# Altium PCB PCB2.PcbDoc
Units mm, origin at the board's own origin, x right, y up, seen from the top; angles counter-clockwise.
Board outline 120.4 x 213.23 mm, 2 copper layers (Top Layer, Bottom Layer); 33 components, 45 nets, 234 pads, 31 vias.
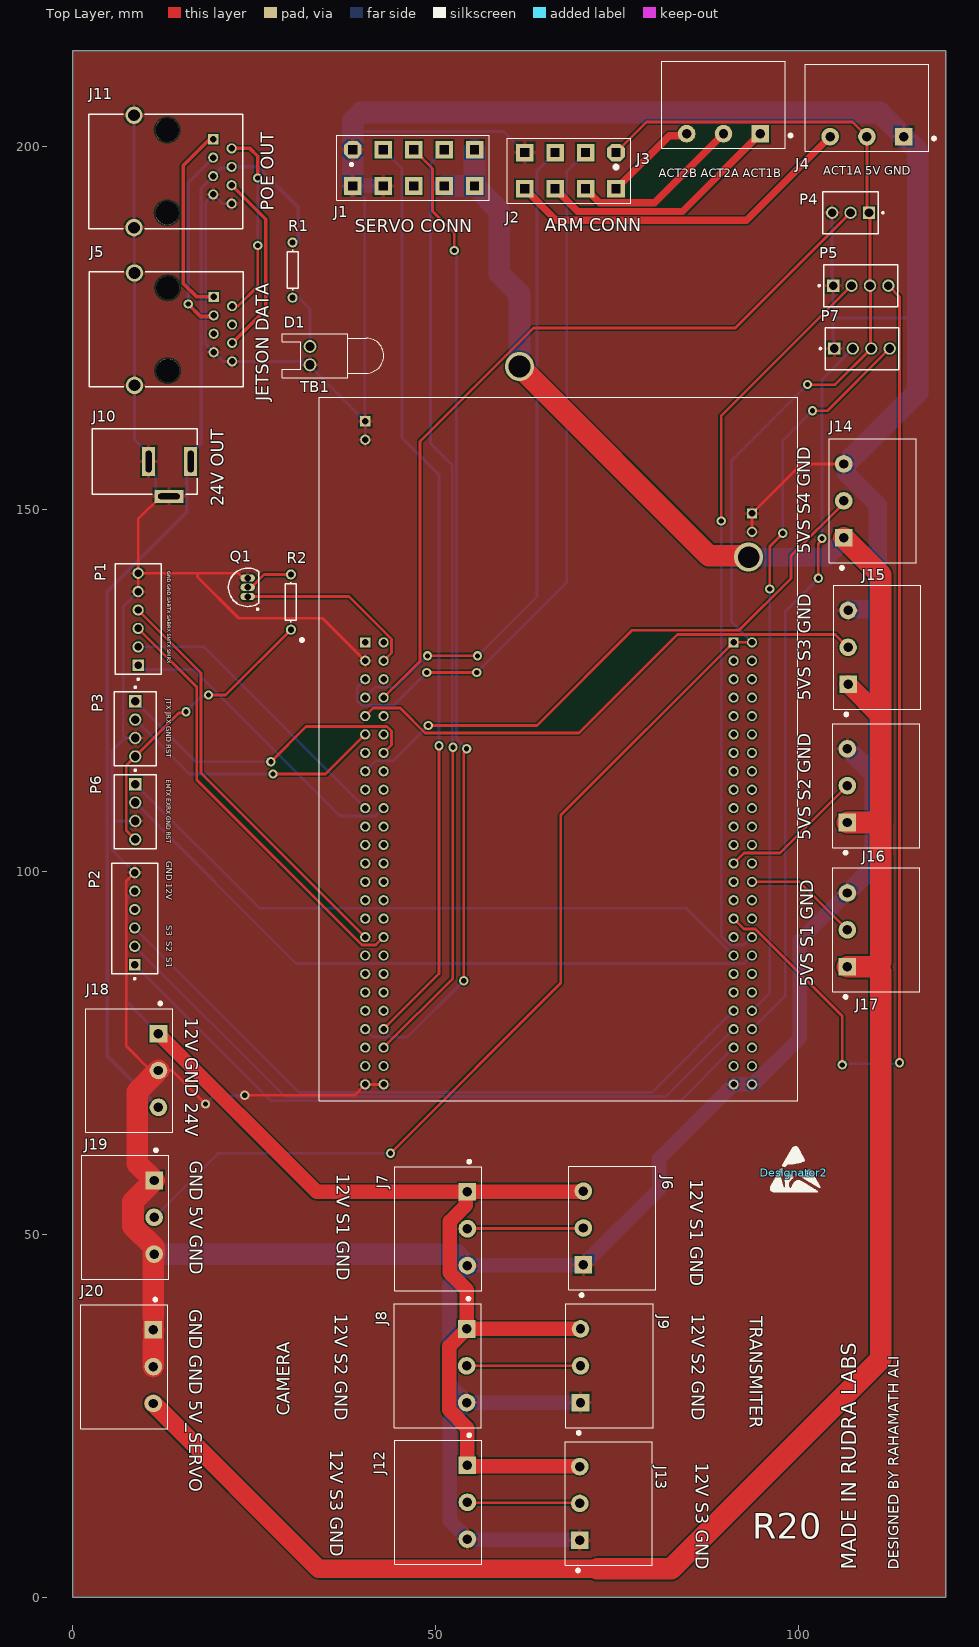
[diagram p0: Top Layer view]
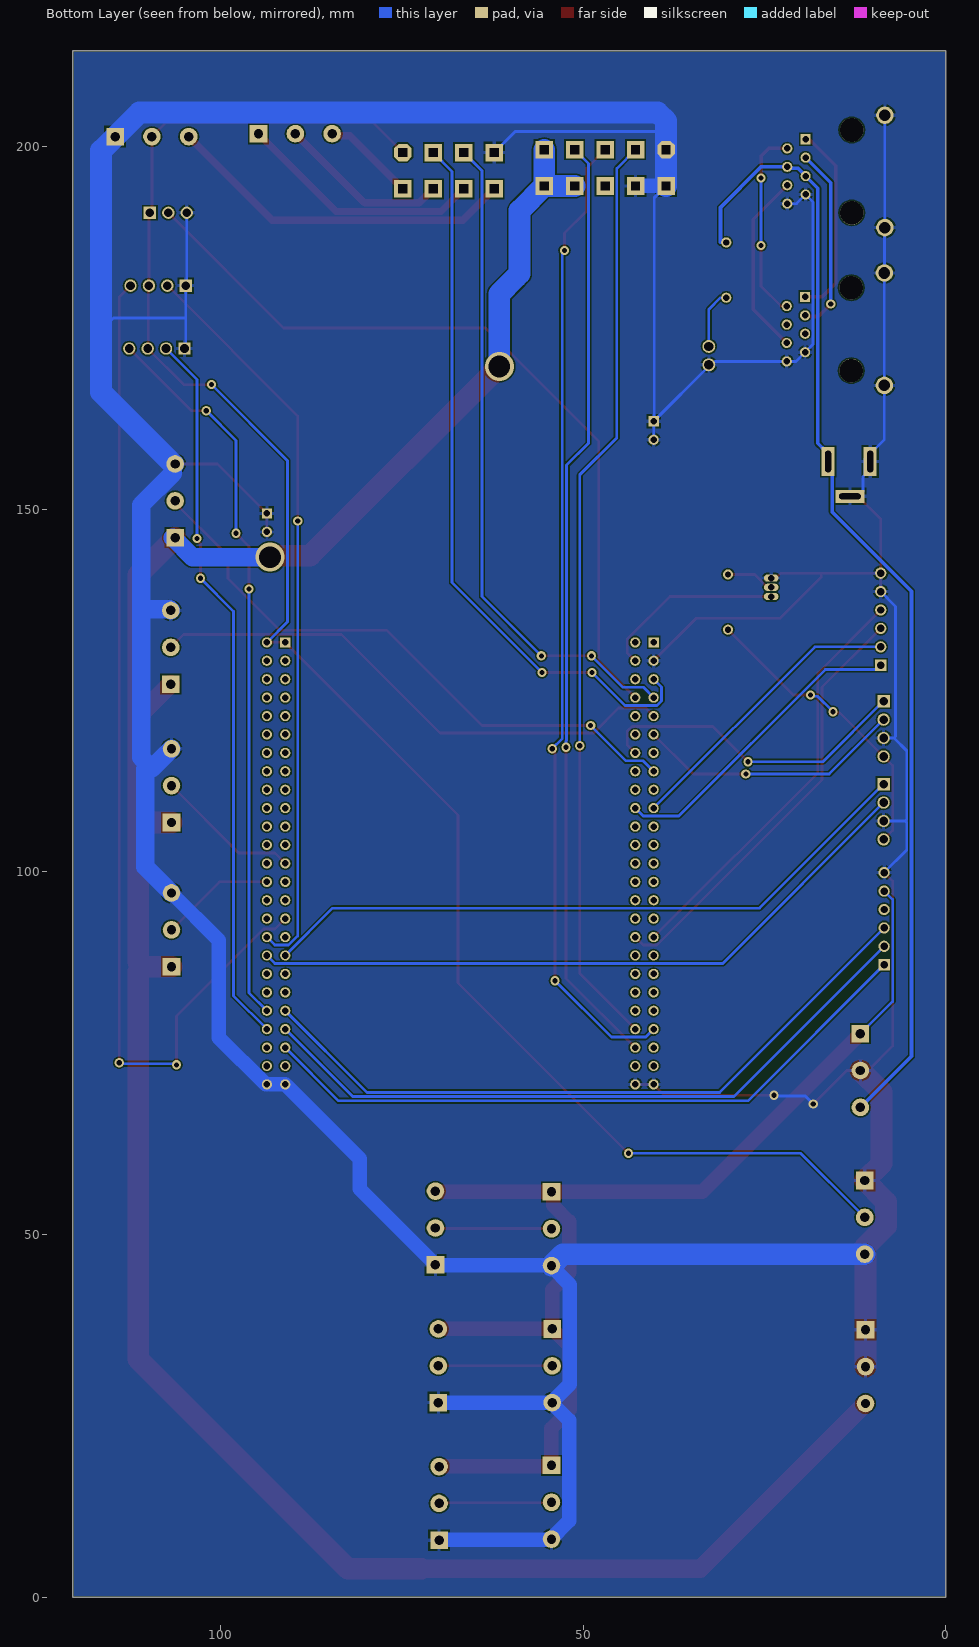
[diagram p1: Bottom Layer view, seen from below]
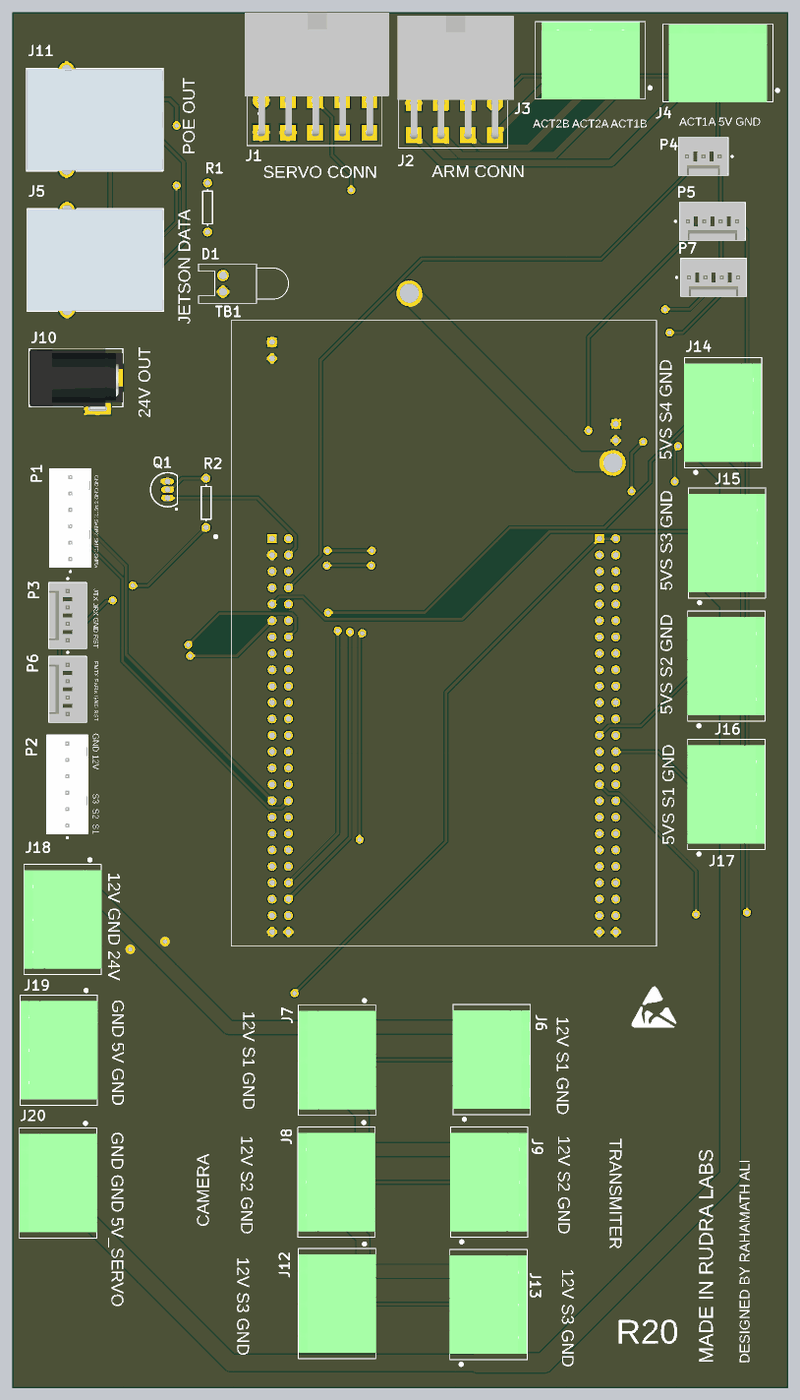
[diagram p2: 3D render of the assembled board from above, using the file's embedded part models]

## Layer stack, top to bottom
Top Solder: solder mask 0.0102, Solder Resist, Dk 3.5
Top Layer: signal copper 0.0356
Dielectric 1: dielectric 0.32, FR-4, Dk 4.8
Bottom Layer: signal copper 0.0356
Bottom Solder: solder mask 0.0102, Solder Resist, Dk 3.5

## Board outline
0,0 120.4,0 120.4,213.225 0,213.225

## Design rules (kind name [scope] priority, off if disabled: settings)
BoardOutlineClearance [All] p1: gap=0.2 ignorepadtopadclearanceinfootprint=FALSE except(0.4: Arc-SplitBarrior Arc-SplitContinuation Track-SplitBarrior Track-SplitContinuation SMDPad-SplitBarrior SMDPad-SplitContinuation THPad-SplitBarrior THPad-SplitContinuation Via-SplitBarrior Via-SplitContinuation Fill-SplitBarrior Fill-SplitContinuation Poly-SplitBarrior Poly-SplitContinuation Region-SplitBarrior Region-SplitContinuation Text-SplitBarrior Text-SplitContinuation)
Clearance "Clearance Bottom Layer" [OnLayer('Bottom Layer')] p1: gap=0.203 ignorepadtopadclearanceinfootprint=TRUE except(0.254: Arc-Text Track-Text SMDPad-Text THPad-Text Via-Text Fill-Text Poly-Text Region-Text Text-Text)
Clearance "Clearance Top Layer" [OnLayer('Top Layer')] p2: gap=0.203 ignorepadtopadclearanceinfootprint=TRUE except(0.254: Arc-Text Track-Text SMDPad-Text THPad-Text Via-Text Fill-Text Poly-Text Region-Text Text-Text)
Clearance [All] p3: gap=0.2 ignorepadtopadclearanceinfootprint=FALSE except(0.089: Arc-Arc Arc-Track Arc-SMDPad Track-Track Track-SMDPad SMDPad-SMDPad; 0.127: Arc-Via Track-Via SMDPad-Via THPad-Via Via-Via; 0.254: Arc-Text Track-Text SMDPad-Text THPad-Text Via-Text Fill-Text Poly-Text Region-Text Text-Text)
HoleSize [All] p1: absolutevalues=TRUE maxlimit=6.3 minlimit=0.2 maxpercent=80.000 minpercent=20.000
MinimumAnnularRing [All] p1: minimumring=0.076
MinimumSolderMaskSliver [All] p1: minsoldermaskwidth=0.1
PolygonConnect PolygonConnect_1 [All] p1: thpad.connectstyle=Relief thpad.reliefconductorwidth=0.508 thpad.reliefentries=4 thpad.polygonreliefangle="90 Angle" thpad.airgapwidth=0.254 smdpad.connectstyle=Relief smdpad.reliefconductorwidth=0.508 smdpad.reliefentries=4 smdpad.polygonreliefangle="90 Angle" smdpad.airgapwidth=0.254 via.connectstyle=Direct via.reliefconductorwidth=0.508 via.reliefentries=4 via.polygonreliefangle="90 Angle" via.airgapwidth=0.254
RoutingCorners [All] p1: cornerstyle=Round minsetback=2.54 maxsetback=2.54
RoutingVias [All] p1: holewidth=0.5 width=1 viastyle="Through Hole" minholewidth=0.2 minwidth=0.45 maxholewidth=3 maxwidth=4
SilkToSilkClearance [All] p1: silktosilkclearance=0.1
SilkToSolderMaskClearance [IsPad] p1: minsilkscreentomaskgap=0.1 clearancetoexposedcopper=TRUE
SolderMaskExpansion [All] p1: expansion=0.102
Width [All] p1: maxlimit=4 minlimit=0.089 preferedwidth=0.381 minimp=50.000000 maximp=50.000000 favimp=50.000000
25 further rules are at their usual default settings.

## Classes and differential pairs
component class "STM32 BOARD": Q1 R2
component class POE+POWER+SERVO+CAMERA: D1 J5 J6 J7 J8 J9 J10 J11 J12 J13 J14 J15 J16 J18 J19 J20 R1
component class "ARM+SERVO+I O": J1 J2 J3 J4 P1 P2 P3 P4 P5 P6 P7

## Components (designator, comment, footprint, x,y, rotation, side; value= is the part's Value field where it differs from the comment)
D1 "LED0" LED-0 32.7,171.2 r90 top
Designator2 "Comment" "LOGO ESD" 99.4,58.5 r0 top
J1 "10 PIN MOLEX CLON" "10 pin molex" 55.4,199.6 r180 top
J2 "8 PIN molex CLON" "8 PIN MOLEX CLON" 74.9,199.2 r180 top
J3 "3 PIN GREEN" PHOENIX_MSTBA_2,5_3-G-5,08_1757255 89.72,201.8 r180 top
J4 "3 PIN GREEN" PHOENIX_MSTBA_2,5_3-G-5,08_1757255 109.5,201.4 r180 top
J5 "61500814221" 61500814221 12.87,174.85 r270 top
J6 "3 PIN GREEN" PHOENIX_MSTBA_2,5_3-G-5,08_1757255 70.4,50.9 r90 top
J7 "3 PIN GREEN" PHOENIX_MSTBA_2,5_3-G-5,08_1757255 54.4,50.8 r270 top
J8 "3 PIN GREEN" PHOENIX_MSTBA_2,5_3-G-5,08_1757255 54.3,31.9 r270 top
J9 "3 PIN GREEN" PHOENIX_MSTBA_2,5_3-G-5,08_1757255 70,31.9 r90 top
J10 "694108301002" 694108301002 9.9,156.6 r270 top
J11 "61500814221" 61500814221 12.8,196.6 r270 top
J12 "3 PIN GREEN" PHOENIX_MSTBA_2,5_3-G-5,08_1757255 54.4,13.08 r270 top
J13 "3 PIN GREEN" PHOENIX_MSTBA_2,5_3-G-5,08_1757255 69.9,12.92 r90 top
J14 "3 PIN GREEN" PHOENIX_MSTBA_2,5_3-G-5,08_1757255 106.3,151.18 r90 top
J15 "3 PIN GREEN" PHOENIX_MSTBA_2,5_3-G-5,08_1757255 106.9,130.98 r90 top
J16 "3 PIN GREEN" PHOENIX_MSTBA_2,5_3-G-5,08_1757255 106.8,111.9 r90 top
J17 "3 PIN GREEN" PHOENIX_MSTBA_2,5_3-G-5,08_1757255 106.8,92.02 r90 top
J18 "3 PIN GREEN" PHOENIX_MSTBA_2,5_3-G-5,08_1757255 11.8,72.62 r270 top
J19 "3 PIN GREEN" PHOENIX_MSTBA_2,5_3-G-5,08_1757255 11.2,52.375 r270 top
J20 "3 PIN GREEN" PHOENIX_MSTBA_2,5_3-G-5,08_1757255 11.1,31.78 r270 top
P1 "22-23-2061" MOLX-22-23-2061_V 9,134.85 r90 top
P2 "22-23-2061" MOLX-22-23-2061_V 8.525,93.555 r90 top
P3 "22-27-2041" MOLX-22-27-2041_V 8.6,119.739 r90 top
P4 "22-27-2031" MOLX-22-27-2031_V 107.24,190.9 r180 top
P5 "22-27-2041" MOLX-22-27-2041_V 108.645,180.85 r180 top
P6 "22-27-2041" MOLX-22-27-2041_V 8.6,108.3 r90 top
P7 "22-27-2041" MOLX-22-27-2041_V 108.82,172.175 r180 top
Q1 "NPN" TO-226-AA 24.1,139.25 r0 top
R1 "Res1" AXIAL-0.3 30.3,183 r90 top value=1K
R2 "Res1" AXIAL-0.3 30.064,137.215 r90 top value=1K
TB1 "STM32F3DISCOVERY" SHIELD_STM32F3DISCOVERY 66.98,116.98 r0 top

## Footprints (in the part's own frame and the unit in brackets; to place one, negate y for a bottom-side part, rotate by r counter-clockwise, add the part's x,y. Pads: shape width x height; smd on the part's side, far side on the other; paste and mask are expansions set on the pad)
"8 PIN MOLEX CLON" [mm]
  oct 2.43x2.43 hole 1.2 square: 1(0,0)
  rect 2.43x2.43 hole 1.2 square: 2(4.2,0) 3(8.4,0) 4(12.6,0) 5(12.6,5) 6(8.4,5) 7(4.2,5) 8(0,5)
  silkscreen extent -2,-2 15,7, body extent -2.95,-13.5 15.15,5.5, height 11
"10 pin molex" [mm]
  oct 2.43x2.43 hole 1.2 square: 1(16.8,0)
  rect 2.43x2.43 hole 1.2 square: 2(12.6,0) 3(8.4,0) 4(4.2,0) 5(0,0) 6(16.8,5) 7(12.6,5) 8(8.4,5) 9(4.2,5) 10(0,5)
  silkscreen extent -2,-2 19,7, body extent -3.1,-13.6 19.3,5.4, height 11
61500814221 [mm] "Modular Jack Horizontal Shielded 8P8C Tab Down"
  rect 1.4x1.4 hole 0.9: 1(-4.445,6.55)
  round 1.4 hole 0.9: 2(-3.175,9.09) 3(-1.905,6.55) 4(-0.635,9.09) 5(0.635,6.55) 6(1.905,9.09) 7(3.175,6.55) 8(4.445,9.09)
  round 3.25 hole 3.25 unplated: MH1(-5.715,0.2) MH2(5.715,0.2)
  round 2.4 hole 1.6: S1(-7.75,-4.37) S2(7.75,-4.37)
  silkscreen extent -7.92,-10.6 7.92,10.6, body extent -7.9,-10.6 7.9,10.6, height 13.7
694108301002 [mm] "DC Power Jack Right Angled(6.4)"
  rect 4x1.8 hole 0.8 slot 3 at 0 deg: 1(0,6.35) 2(0,0.55)
  rect 1.8x4 hole 0.8 slot 3 at 90 deg: 3(4.8,3.35)
  silkscreen extent -4.5,-7.25 4.5,7.25, body extent -4.5,-7.25 5,7.25, height 10.75
AXIAL-0.3 [mm] "Axial Device, Thru-Hole; 2 Leads; 0.3 in Pin Spacing"
  round 1.4 hole 0.85: 1(-3.81,0) 2(3.81,0)
  silkscreen extent -2.77,-0.76 2.77,0.76
LED-0 [mil] "LED; 2 Leads"
  round 70 hole 50: 1(50,0) 2(-50,0)
  silkscreen extent -120,-400 120,150
"LOGO ESD" [mm]
  silkscreen extent -3.23,-2.59 3.66,3.68
MOLX-22-23-2061_V [mm] "THD, 6-Leads, Body 15.24x6.35mm, Pitch 2.54mm"
  rect 1.55x1.55 hole 1.02: 1(-6.35,0)
  round 1.55 hole 1.02: 2(-3.81,0) 3(-1.27,0) 4(1.27,0) 5(3.81,0) 6(6.35,0)
  silkscreen extent -8.39,-3.18 7.62,3.18, body extent -7.54,-3.25 7.54,3.1, height 10.67
MOLX-22-27-2031_V [mm] "Header, 3-Leads, Body 7.62x5.8mm, Pitch 2.54mm"
  rect 1.7x1.7 hole 1.19 paste+0: 1(-2.54,0)
  round 1.7 hole 1.19 paste+0: 2(0,0) 3(2.54,0)
  silkscreen extent -4.59,-2.92 3.81,2.88, body extent -3.81,-2.92 3.81,2.88, height 11.71
MOLX-22-27-2041_V [mm] "CONN, 4-Leads, Body 10.16x5.8mm, Pitch 2.54mm"
  rect 1.7x1.7 hole 1.19: 1(3.81,0)
  round 1.7 hole 1.19: 2(1.27,0) 3(-1.27,0) 4(-3.81,0)
  silkscreen extent -5.08,-2.9 5.85,2.9, body extent -5.08,-2.9 5.08,2.9, height 11.7
PHOENIX_MSTBA_2,5_3-G-5,08_1757255 [mm]
  rect 2.43x2.43 hole 1.3: 1(-5.08,0)
  round 2.43 hole 1.3: 2(0,0) 3(5.08,0)
  silkscreen extent -9.45,-10 8.54,2, body extent -7.62,-9.94 7.62,2.06, height 8.6
SHIELD_STM32F3DISCOVERY [mm]
  rect 1.408x1.408 hole 0.9: 1(-26.67,14.68) 51(24.13,14.68) 101(-26.67,45.16) 103(26.67,32.46)
  round 1.408 hole 0.9: 2(-24.13,14.68) 3(-26.67,12.14) 4(-24.13,12.14) 5(-26.67,9.6) 6(-24.13,9.6) 7(-26.67,7.06) 8(-24.13,7.06) 9(-26.67,4.52) 10(-24.13,4.52) 11(-26.67,1.98) 12(-24.13,1.98) 13(-26.67,-0.56) 14(-24.13,-0.56) 15(-26.67,-3.1) 16(-24.13,-3.1) 17(-26.67,-5.64) 18(-24.13,-5.64) 19(-26.67,-8.18) 20(-24.13,-8.18) 21(-26.67,-10.72) 22(-24.13,-10.72) 23(-26.67,-13.26) 24(-24.13,-13.26) 25(-26.67,-15.8) 26(-24.13,-15.8) 27(-26.67,-18.34) 28(-24.13,-18.34) 29(-26.67,-20.88) 30(-24.13,-20.88) 31(-26.67,-23.42) 32(-24.13,-23.42) 33(-26.67,-25.96) 34(-24.13,-25.96) 35(-26.67,-28.5) 36(-24.13,-28.5) 37(-26.67,-31.04) 38(-24.13,-31.04) 39(-26.67,-33.58) 40(-24.13,-33.58) 41(-26.67,-36.12) 42(-24.13,-36.12) 43(-26.67,-38.66) 44(-24.13,-38.66) 45(-26.67,-41.2) 46(-24.13,-41.2) 47(-26.67,-43.74) 48(-24.13,-43.74) 49(-26.67,-46.28) 50(-24.13,-46.28) 52(26.67,14.68) 53(24.13,12.14) 54(26.67,12.14) 55(24.13,9.6) 56(26.67,9.6) 57(24.13,7.06) 58(26.67,7.06) 59(24.13,4.52) 60(26.67,4.52) 61(24.13,1.98) 62(26.67,1.98) 63(24.13,-0.56) 64(26.67,-0.56) 65(24.13,-3.1) 66(26.67,-3.1) 67(24.13,-5.64) 68(26.67,-5.64) 69(24.13,-8.18) 70(26.67,-8.18) 71(24.13,-10.72) 72(26.67,-10.72) 73(24.13,-13.26) 74(26.67,-13.26) 75(24.13,-15.8) 76(26.67,-15.8) 77(24.13,-18.34) 78(26.67,-18.34) 79(24.13,-20.88) 80(26.67,-20.88) 81(24.13,-23.42) 82(26.67,-23.42) 83(24.13,-25.96) 84(26.67,-25.96) 85(24.13,-28.5) 86(26.67,-28.5) 87(24.13,-31.04) 88(26.67,-31.04) 89(24.13,-33.58) 90(26.67,-33.58) 91(24.13,-36.12) 92(26.67,-36.12) 93(24.13,-38.66) 94(26.67,-38.66) 95(24.13,-41.2) 96(26.67,-41.2) 97(24.13,-43.74) 98(26.67,-43.74) 99(24.13,-46.28) 100(26.67,-46.28) 102(-26.67,42.62) 104(26.67,29.92)
  silkscreen extent -35.6,-48.5 33,48.5
TO-226-AA [mm] "TO, Flat Index; 3 In-Line, Axial Leads; Body Dia. 4.8mm; Leads 0.55 x 0.51 mm (max)"
  oval 2x1 hole 0.9: 1(0,-1.27) 2(0,0) 3(0,1.27)
  silkscreen extent -2.65,-3.13 1.52,2.65, body extent -2.65,-2.66 1.52,2.66, height 5.33

## Part data
D1: "Typical INFRARED GaAs LED", LatestRevisionDate=08-Jul-2005, LatestRevisionNote="Mech Layer 1 removed.", PackageDescription="LED; 2 Leads", PackageReference=LED-0, Published=8-Jun-2000, Publisher="Altium Limited"
J2: Color=Black, Manufacturer 1=Molex, Manufacturer Part Number 1=76825-0008, Supplier Part Number 1=WM11972-ND, ComponentLink1Description=http://www.alliedelec.com/images/products/datasheets/bm/BrandonData/70717241.pdf?src-supplier=Allied+Electronics, ComponentLink1URL=http://www.alliedelec.com/images/products/datasheets/bm/BrandonData/70717241.pdf?src-supplier=Allied+Electronics, ComponentLink2Description=http://www.farnell.com/datasheets/2216656.pdf?src-supplier=Farnell, ComponentLink2URL=http://www.farnell.com/datasheets/2216656.pdf?src-supplier=Farnell, ComponentLink3Description=http://www.farnell.com/datasheets/1968956.pdf?src-supplier=Element14, ComponentLink3URL=http://www.farnell.com/datasheets/1968956.pdf?src-supplier=Element14, ComponentLink4Description=http://www.farnell.com/datasheets/2001779.pdf?src-supplier=Element14, ComponentLink4URL=http://www.farnell.com/datasheets/2001779.pdf?src-supplier=Element14, ComponentLink5Description=http://www.farnell.com/datasheets/2216656.pdf?src-supplier=Newark, ComponentLink5URL=http://www.farnell.com/datasheets/2216656.pdf?src-supplier=Newark, ComponentLink6Description=https://www.molex.com/pdm_docs/sd/768250008_sd.pdf?src-supplier=Digi-Key, ComponentLink6URL=https://www.molex.com/pdm_docs/sd/768250008_sd.pdf?src-supplier=Digi-Key, Contact Material=Copper, Contact Plating=Tin, Gender=Male, Mount="Through Hole", Number of Circuits=8, Number of Contacts=8, Number of Pins=8, Number of Rows=2, Orientation="Right Angle", Pitch=5.7mm, Pricing 1="1=2.83000, 10=2.72000, 25=2.49360, 50=2.38040, 100=2.26700, 250=1.98364, 672=1.92695, 1344=1.64357, 2688=1.53022 (USD)", REACH SVHC=Unknown, RoHS=Yes, Stock 1=794, Supplier 1=Digi-Key, Termination="Through Hole"
J3 J4 J6 J7 J8 J9 J12 J13 J14 J15 J16 J17 J18 J19 J20: Color=Grey,Green, Current=15A, Current Rating=12A, Flammability Rating="UL94 V-0", Housing Color=Green, Manufacturer 1="Phoenix Contact", Manufacturer Part Number 1=1757255, Package Quantity=50, Supplier Part Number 1=277-1107-ND, Voltage=300V, Voltage Rating=250V, Voltage Rating (DC)=320V, Approvals=UL,CSA,VDE,EN, ComponentLink1Description=https://datasheet.ciiva.com/15197/getdatasheetpartid-176351-15197329.pdf?src-supplier=Verical, ComponentLink1URL=https://datasheet.ciiva.com/15197/getdatasheetpartid-176351-15197329.pdf?src-supplier=Verical, ComponentLink2Description=https://datasheet.ciiva.com/16096/1757255-16096404.pdf?src-supplier=Onlinecomponents.com, ComponentLink2URL=https://datasheet.ciiva.com/16096/1757255-16096404.pdf?src-supplier=Onlinecomponents.com, ComponentLink3Description=https://datasheet.ciiva.com/7630/1697152-7630840.pdf?src-supplier=Element14, ComponentLink3URL=https://datasheet.ciiva.com/7630/1697152-7630840.pdf?src-supplier=Element14, ComponentLink4Description=https://datasheet.ciiva.com/795/1757255-795421.pdf?src-supplier=Digi-Key, ComponentLink4URL=https://datasheet.ciiva.com/795/1757255-795421.pdf?src-supplier=Digi-Key, ComponentLink5Description=https://datasheet.ciiva.com/29210/569707-da-01-en-grundgehaeuse-1757255-250-st-29210878.pdf?src-supplier=Conrad, ComponentLink5URL=https://datasheet.ciiva.com/29210/569707-da-01-en-grundgehaeuse-1757255-250-st-29210878.pdf?src-supplier=Conrad, Connector Type=Plug, Contact Material=Tin, Contact Plating=Tin, Depth=12mm, Gender=Male, Height=12.1mm, Housing Material=Polybutylene, Lead Free="Lead Free", Length=17.24mm, Max Current Rating=12A, Mount="Through Hole", Number of Contacts=3, Number of Levels=1, Number of Poles=3, Number of Positions=3, Number of Positions Per Level=3, Number of Rows=1, Orientation="Right Angle", Packaging=Bulk, Pitch=5.08mm, Pricing 1="1=1.03000, 10=0.99000, 50=0.94720, 100=0.92130, 250=0.86100, 500=0.79212, 1000=0.73185, 2500=0.69741, 5000=0.65436 (USD)", REACH SVHC="No SVHC", RoHS=Yes, Stock 1=4025, Supplier 1=Digi-Key, Termination=Solder, Weight=5.396916oz, Width=17.16mm
J5 J11: library part RJ45, "Modular Jack WR-MJ, Tab Down, Shielded, Horizontal Entry, THT, 8P8C", Color=Black, Contact Resistance=20mOhm, Current Rating=1.5A, Flammability Rating="UL94 V-0", Insulation Resistance=500MR, Manufacturer="Wurth Elektronik", Manufacturer 1="Wurth Electronics", Max Operating Temperature=85°C, Min Operating Temperature=-40°C, Operating Temperature=-40to85degC, Package Quantity=80, Supplier Part Number 1=732-2111-ND, Voltage Rating (AC)=120V, Withstanding Voltage=1000VAC, Working Voltage=120VAC, Compliance=Leadfree/RoHS, ComponentLink1Description=https://datasheet.ciiva.com/1108/76605-1108145.pdf?src-supplier=Element14, ComponentLink1URL=https://datasheet.ciiva.com/1108/76605-1108145.pdf?src-supplier=Element14, ComponentLink2Description=https://datasheet.ciiva.com/4561/61500814221-78459-4561634.pdf?src-supplier=Mouser, ComponentLink2URL=https://datasheet.ciiva.com/4561/61500814221-78459-4561634.pdf?src-supplier=Mouser, ComponentLink3Description=https://datasheet.ciiva.com/686/61500814221-686710.pdf?src-supplier=Digi-Key, ComponentLink3URL=https://datasheet.ciiva.com/686/61500814221-686710.pdf?src-supplier=Digi-Key, ComponentLink4Description=https://datasheet.ciiva.com/11726/0900766b80f88678-11726201.pdf?src-supplier=RSComponents, ComponentLink4URL=https://datasheet.ciiva.com/11726/0900766b80f88678-11726201.pdf?src-supplier=RSComponents, ComponentLink5Description=https://datasheet.ciiva.com/48689/001088220-da-01-en-wr-com-modular-jack-61500814221-48689546.pdf?src-supplier=Conrad, ComponentLink5URL=https://datasheet.ciiva.com/48689/001088220-da-01-en-wr-com-modular-jack-61500814221-48689546.pdf?src-supplier=Conrad, Connector Type=Jack,RJ45,Socket, Contact Material="Copper Alloy,Copper", Contact Plating=Gold, Datasheet URL=https://katalog.we-online.de/em/datasheet/61500814221.pdf, Depth=21.2mm, Direction=Down, Entrance=Horizontal, Gender=Female, Height=19.95mm, Housing Material=PBT, Length=13.65mm, Manufacturer Part Number 1=61500814221, Manufacturer URL=http://www.we-online.de, Mating Cycles=500, Mount="Through Hole,PCB", Mounting Technology=THT, Number of Contacts=8, Number of Ports=1, Number of Positions=8, Number of Rows=1, Orientation="Right Angle", Package Reference=61500814221, Packaging=Tray, Part Number=61500814221, Pin Number=8P8C, Port=1x1, Pricing 1="1=2.38000, 10=2.33000, 50=2.24000, 100=2.15000, 500=2.06100 (USD)", Publisher=WurthElektronik, Rated Current=1.5A, REACH SVHC=Unknown, RoHS=Yes, Shielding=Shielded, Stock 1=262, Supplier 1=Digi-Key, Termination="Through Hole", Width=15.88mm
J10: library part "DC POWER JACK", "DC Power Jack Connector WR-DC, Male, Right Angled, THT, 5 A, 24 V", Manufacturer="Wurth Elektronik", Operating Temperature=-40to85degC, Rated Current=5A, Working Voltage=24V, Datasheet URL=http://katalog.we-online.de/em/datasheet/6941xx301002.pdf, Gender=Male, Manufacturer URL=http://www.we-online.de, Mounting Technology=THT, Opening Diameter=6.4mm, Orientation=RightAngled, Package Reference=694108301002, Packaging=Bag, Part Number=694108301002, Plug Inner Diameter=2.55mm, Plug Outer Diameter=5.5mm, Publisher=WurthElektronik
P1 P2: library part CMP-2000-05536-1, "Male Header, Pitch 2.54 mm, 1 x 6 Position, Height 10.67 mm, Tail Length 3.56 mm, 0 to 70 degC, RoHS, Bulk", Current Rating=4A, Manufacturer=Molex, Package Description="Male Header, Pitch 2.54 mm, 1 x 6 Position, Height 10.67 mm, Tail Length 3.56 mm", Voltage Rating=250V, =002223206122-23-2061-PBA-6373-06A102, Brand=Molex, Contact Material=Brass, Contact Plating=Tin, Datasheet URL=https://datasheet.ciiva.com/19460/232303-19460895.pdf, Datasheet Version="Rev. P, 09/2001", Factory Pack Quantity=1000, Housing Material=Nylon, Manufacturer URL=http://www.molex.com/, Mounting Angle=Vertical, Mounting Style=ThroughHole, Mounting Technology=ThroughHole, Number of Positions=6, Number of Positions / Contacts=6, Number of Rows=1, Package Reference=22-23-2061, Packaging=Bulk, Pitch=2.54mm, Product Category=.100K.K.Connectors, Product Type=Headers, RoHS=Details, Series=6373, Termination Style=ThroughHole, Tradename=KK, Type=PinStrip
P3 P5 P6 P7: library part CMP-2000-05243-1, "Male Header, Pitch 2.54 mm, 1 x 4 Position, Height 11.7 mm, Tail Length 3.56 mm, RoHS, Bulk", Current Rating=4A, Manufacturer=Molex, Operating Temperature=0degCto+75degC, Voltage Rating=250V, Contact Material=Tinplatedbrass, Datasheet URL=http://www.molex.com/pdm_docs/sd/022272041_sd.pdf, Datasheet Version="Rev. F, 06/2009", Housing Material=Nylon(UL94V-0), Manufacturer URL=http://www.molex.com/
P4: library part CMP-2000-05538-1, "Male Header, Pitch 2.54 mm, 1 x 3 Position, Height 11.7 mm, Tail Length 3.56 mm, -40 to 80 degC, RoHS, Bulk", Current Rating=4A, Manufacturer=Molex, Operating Temperature=0°Cto+75°C, Package Description="Male Header, Pitch 2.54 mm, 1 x 3 Position, Height 11.7 mm, Tail Length 3.56 mm", Voltage Rating=250V, Contact Material=Tinplatedbrass, Datasheet URL=http://www.molex.com/webdocs/datasheets/pdf/en-us/0022272031_PCB_HEADERS.pdf, Datasheet Version=06/2016, Housing Material=Nylon(UL94V-0), Manufacturer URL=http://www.molex.com/, Mounting Technology=ThroughHole, Package Reference=22-27-2031, Package URL=http://www.molex.com/pdm_docs/sd/022272031_sd.pdf
Q1: "NPN Bipolar Transistor", Code_JEDEC=TO-226-AA, LatestRevisionDate=17-Jul-2002, LatestRevisionNote="Re-released for DXP Platform.", PackageDescription="TO, Flat Index; 3 In-Line, Axial Leads; Body Dia. 4.8mm; Leads 0.55 x 0.51 mm (max)", PackageReference=TO-226-AA, Published=8-Jun-2000, Publisher="Altium Limited"
R1 R2: "Resistor", LatestRevisionDate=17-Jul-2002, LatestRevisionNote="Re-released for DXP Platform.", PackageDescription="Axial Device, Thru-Hole; 2 Leads; 0.3 in Pin Spacing", PackageReference=AXIAL-0.3, Published=8-Jun-2000, Publisher="Altium Limited"
TB1: "STM32F303VCT6 Discovery STM32F3 ARM® Cortex®-M4 MCU 32-Bit Embedded Evaluation Board", Package="LQFP-100 STMicroelectronics", Availability=Unavailable, MF=STMicroelectronics, MP=STM32F3DISCOVERY, Price=None, SnapEDA_Link=https://www.snapeda.com/parts/STM32F3DISCOVERY/STMicroelectronics/view-part/10815/?ref=snap

## Via types
v1: diameter 1.27, hole 0.711, Top Layer to Bottom Layer, 29 vias
v2: diameter 4, hole 3, Top Layer to Bottom Layer, 2 vias

## Nets (pads, with @x,y where several pads share a name; then routed paths per layer and width w, separated by ;. In a path a pad name is that pad's centre, name@x,y a point inside that pad or via, vN(x,y) a via of type N, cw(c..) or ccw(c..) an arc to the next point about the centre after c; other vN are vias at no path point)
5V: J2.1 J4.2 J19.2 P4.1 P5.3 P7.3 TB1.51 TB1.52 | length 247
  Top Layer w0.381: v1(43.8,61.2) 67.283,84.683 67.283,107.833 TB1.51 TB1.52 ; J2.1 79.109,203.409 107.491,203.409 J4.2 109.5,191.18 109.915,190.765 P5.3 110.003,180.763 110.003,172.263 P7.3 105.115,167.2 v1(101.3,167.2)
  Bottom Layer w0.381: J19.2@11.869,52.506 11.869,53.044 20.025,61.2 v1(43.8,61.2) ; TB1.52 90.806,134.504 90.806,156.706 v1(101.3,167.2)
5V_SERVO: J1.5 J1.9 J1.10 J14.1 J15.1 J16.1 J17.1 J20.3 | length 346.3
  Top Layer w2.54: J20.3 33.9,3.9 72.3,3.9 ; J15.1 111.4,121.4
  Top Layer w3: v2(61.6,169.7) 87.709,143.591 93.009,143.591 v2(93.2,143.4) ; 72.3,3.9 82.5,3.9 111.4,32.8 111.4,86.28 110.74,86.94 ; J14.1 111.4,141 111.4,121.4 111.4,106.8 111.38,106.82 ; J17.1 110.74,86.94 ; J16.1 111.38,106.82 ; 110.74,86.94 111.4,87.6 111.4,102.22 111.38,102.24 111.38,106.82
  Bottom Layer w0.381: 58.8,182.5 59.3,182
  Bottom Layer w2.54: v2(93.2,143.4) 103.9,143.4 J14.1@106.6,146.1
  Bottom Layer w3: J1.9 J1.10 ; J1.5 J1.10 ; 58.8,182.5 58.8,191.2 J1.10 ; 59.3,182 61.6,179.7 v2(61.6,169.7)
12V: J6.3 J7.1 J8.1 J9.3 J12.1 J13.3 J18.1 P2.5 | length 162.1
  Top Layer w2: J18.1@12.015,77.485 33.62,55.88 J7.1 54.185,55.665 54.185,54.005 51.982,51.802 51.982,44.718 54.3,42.4 J8.1 ; J7.1@54.615,55.93 70.35,55.93 J6.3 ; J13.3 69.82,18.08 54.48,18.08 J12.1 54.4,23.3 51.882,25.818 51.882,34.562 J8.1 ; J9.3 J8.1
  Bottom Layer w0.381: P2.5 7.356,96.196 7.356,82.144 J18.1
24V: J10.1 J11.4 J11.5 J18.3 R1.2 | length 155.2
  Bottom Layer w0.5: J18.3 4.763,74.577 4.763,138.7 15.703,149.64 15.703,156.053 J10.1 ; J10.1@16.6,158.05 17.683,159.133 17.683,194.298 20.448,197.063 21.718,197.063 J11.4 25.504,197.235 31.1,191.639 31.1,186.81
ACT1A: J2.5 J4.3 | length 48.7
  Top Layer w1: J2.5 66.625,189.875 92.895,189.875 J4.3
ACT1B: J2.6 J3.1 | length 34
  Top Layer w1: J2.6 69.621,191.079 84.079,191.079 J3.1
ACT2A: J2.7 J3.2 | length 23.8
  Top Layer w1: J2.7 72.618,192.282 80.202,192.282 J3.2
ACT2B: J2.8 J3.3 | length 12.9
  Top Layer w1: J2.8 82.226,201.526 84.366,201.526 J3.3
"ARM ENCODER 1": J2.2 TB1.5 | length 100
  Top Layer w0.381: v1(48.8,127.5) v1(55.7,127.5)
  Bottom Layer w0.381: TB1.5 39.213,125.482 39.213,123.585 39.856,122.942 44.242,122.942 v1(48.8,127.5) ; v1(55.7,127.5) 68.109,139.909 68.109,196.609 J2.2
"ARM ENCODER 2": J2.3 TB1.7 | length 91.7
  Top Layer w0.381: v1(48.9,129.8) v1(55.8,129.8)
  Bottom Layer w0.381: TB1.7 41.753,125.482 44.582,125.482 v1(48.9,129.8) ; v1(55.8,129.8) 63.994,137.994 63.994,196.694 J2.3
"ARM SERVO 1": J1.2 TB1.44 | length 127.6
  Top Layer w0.381: TB1.44 50.5,85.97 v1(50.5,117.4)
  Bottom Layer w0.381: J1.2 45.391,197.009 45.391,159.879 50.5,154.77 v1(50.5,117.4)
"ARM SERVO 2": J1.3 TB1.43 | length 135.1
  Top Layer w0.381: J1.3 49.591,197.009 49.591,191.109 52.6,188.1 v1(52.6,185.7) ; v1(53.9,85) 53.9,116.359 54.3,116.759 v1(54.3,117)
  Bottom Layer w0.381: TB1.43 41.408,77.222 46.122,77.222 v1(53.9,85) ; v1(52.6,185.7) 52.9,185.4 52.9,118.4 v1(54.3,117)
"ARM SERVO 3": J1.4 TB1.46 | length 129.8
  Top Layer w0.381: TB1.46 52.4,85.33 v1(52.4,117.2)
  Bottom Layer w0.381: J1.4 49.306,197.706 49.306,159.12 52.316,156.111 52.316,118.158 52.4,118.074 v1(52.4,117.2)
"CAM_SERVO 1": J17.2 TB1.78 | length 15.9
  Top Layer w0.381: TB1.78 100.18,98.64 J17.2
"CAM_SERVO 2": J16.2 TB1.75 | length 20.1
  Top Layer w0.381: TB1.75 92.553,102.622 97.522,102.622 J16.2
"CAM_SERVO 3": J15.2 TB1.9 | length 74.8
  Top Layer w0.381: TB1.9 41.408,122.598 45.147,122.598 48.574,119.171 69.778,119.171 83.364,132.758 105.122,132.758 J15.2
"CAM_SERVO 4": J14.2 TB1.15 | length 83.6
  Top Layer w0.381: v1(49,120.2) 63.998,120.2 77.14,133.342 91.897,133.342 99.02,140.465 99.02,143.6 J14.2@106.6,151.18
  Bottom Layer w0.381: TB1.15 41.753,115.322 44.122,115.322 v1(49,120.2)
"EMER RX": P6.2 TB1.86 | length 94.7
  Bottom Layer w0.381: P6.2 30.788,87.382 92.553,87.382 TB1.86
"EMER TX": P6.1 TB1.85 | length 92.3
  Bottom Layer w0.381: P6.1 25.708,95.002 84.588,95.002 TB1.85
GND: D1.2 J1.1 J1.6 J1.7 J2.4 J4.1 J5.7 J5.8 J5.S1 J5.S2 J6.1 J7.3 J8.3 J9.1 J10.2 J10.3 J11.7 J11.8 J11.S1 J11.S2 J12.3 J13.1 J14.3 J15.3 J16.3 J17.3 J18.2 J19.1 J19.3 J20.1 J20.2 P1.5 P1.6 P2.6 P3.3 P4.3 P5.1 P6.3 P7.1 Q1.3 TB1.3 TB1.49 TB1.50 TB1.99 TB1.100 TB1.101 TB1.102 TB1.103 TB1.104 | length 844.8
  Top Layer w0.381: P2.6 7.356,98.736 7.356,75.984 J18.2@10.72,72.62 ; P1.5 P1.6 ; J18.2 13.68,72.62 v1(18.3,68) ; J10.3 12.15,151.8 9,148.65 P1.6 ; v1(23.7,69.2) 38.81,69.2 TB1.49 TB1.50 TB1.50@42.771,70.621 ; Q1.3 23.445,140.52 22.765,141.2 17.2,141.2 ; TB1.3 34.441,134.989 22.872,134.989 17.2,140.661 17.2,141.2 ; TB1.104 TB1.103 100.47,156.26 J14.3@106.6,156.26 ; P1.6 17.2,141.2
  Top Layer w3: J20.2 J20.1 11.1,47.195 J19.3 11.2,48.248 8.282,51.166 8.282,54.537 J19.1 8.882,59.773 8.882,69.702 J18.2
  Bottom Layer w0.381: J11.S1 J11.S2 8.465,188.815 8.465,182.635 J5.S1 J5.S2 8.5,159.65 11.16,156.99 11.16,154.79 11.44,154.51 11.44,152.509 12.15,151.8 J10.3 J10.3@14.05,151.8 ; P2.6 5.407,103.023 5.407,106.807 5.63,107.03 ; P6.3 5.63,107.03 ; P3.3 7.169,118.469 ; P1.5 6.946,136.606 6.946,118.692 7.169,118.469 ; v1(18.3,68) 19.4,69.1 23.6,69.1 v1(23.7,69.2) ; J11.8 21.889,192.157 20.619,192.157 J11.7 18.326,192.401 18.326,172.769 J5.7 20.689,170.407 J5.8 J5.8 31.847,170.405 32.322,169.93 D1.2 32.7,169.75 TB1.101@40.234,162.217 ; J1.6 40.234,192.966 TB1.101@40.234,162.217 ; 38.6,201.5 39.207,202.107 59.393,202.107 J2.4 ; TB1.102 TB1.101 TB1.101@40.234,162.217 ; P4.3 104.7,180.985 P5.1 104.835,176.4 ; P7.1 104.835,172.35 104.835,176.4 ; 110.29,114.29 110.44,114.14 ; 110.35,136.75 110.5,136.9 ; 116.32,165.98 116.51,166.17 ; 116.51,174.69 114.8,176.4 104.835,176.4 ; 5.63,107.03 5.407,107.253 5.407,116.707 7.169,118.469
  Bottom Layer w2: J1.6 J1.7 ; J7.3 54.4,45.604 51.882,43.085 51.882,29.355 54.3,26.936 J8.3 54.3,26.704 51.982,24.385 51.982,10.535 54.596,7.92 J13.1@69.82,7.92 ; J8.3@54.499,26.82 J9.1 ; J7.3@54.516,45.72 54.566,45.77 J6.1@70.35,45.77 ; J6.1 80.863,56.283 80.863,60.452 TB1.99 TB1.100 93.807,70.7 100.263,77.155 100.263,90.563 J17.3
  Bottom Layer w2.54: J14.3@106.6,156.26 106.6,154.982 111,150.582 111,136.75 111,115.8 109.49,114.29 ; J17.3 110.44,100.74 110.44,114.14 ; J16.3 109.49,114.29 ; J15.3 107.04,136.2 110.9,136.2 ; 110.29,114.29 109.49,114.29
  Bottom Layer w3: J19.3 52.825,47.295 J7.3 ; J1.6 J1.1 38.6,201.5 38.6,203.572 39.747,204.718 111.262,204.718 J4.1 116.51,199.47 116.51,174.69 116.51,166.17 ; J14.3@106.6,156.26 116.32,165.98
"H1 GPIO1": P5.2 TB1.84 | length 102.3
  Top Layer w0.381: v1(89.4,148.4) 89.4,162.875 P5.2
  Bottom Layer w0.381: v1(89.4,148.4) 89.4,91.178 90.656,89.922 92.553,89.922 TB1.84
"H1 GPIO2": P5.4 TB1.81 | length 143.1
  Top Layer w0.381: TB1.81 92.553,92.118 94.105,92.118 106.1,80.123 v1(106.1,73.4) ; P5.4 114,179.305 v1(114,73.7)
  Bottom Layer w0.381: v1(106.1,73.4) 106.25,73.55 113.85,73.55 v1(114,73.7)
"H2 GPIO1": P7.2 TB1.94 | length 99.6
  Top Layer w0.381: v1(102.8,140.5) 102.8,145.259 103.3,145.759 v1(103.3,146)
  Bottom Layer w0.381: TB1.94 98.238,82.908 98.238,135.938 v1(102.8,140.5) ; v1(103.3,146) 103.3,167.925 P7.2
"H2 GPIO2": P7.4 TB1.92 | length 100.4
  Top Layer w0.381: v1(96.1,139) 96.1,144.9 v1(97.9,146.7) ; v1(102,163.6) 104.055,163.6 P7.4
  Bottom Layer w0.381: TB1.92 96.1,83.31 v1(96.1,139) ; v1(97.9,146.7) 97.9,159.5 v1(102,163.6)
"JETSON RX": P3.2 TB1.11 | length 37.1
  Top Layer w0.381: v1(27.6,113.5) 34.85,113.5 TB1.11
  Bottom Layer w0.381: P3.2 16.109,113.5 v1(27.6,113.5)
"JETSON TX": P3.1 TB1.14 | length 44.5
  Top Layer w0.381: v1(27.3,115.2) 32.158,120.058 43.305,120.058 43.948,119.415 43.948,117.518 TB1.14
  Bottom Layer w0.381: P3.1 16.949,115.2 v1(27.3,115.2)
NetD1_1: D1.1 R1.1 | length 7.7
  Bottom Layer w0.381: 31.1,179.19 32.7,177.59 32.7,173.115 D1.1@33.345,172.47
NetQ1_2: Q1.2 R2.2 | length 6.7
  Top Layer w0.381: Q1.2 24.6,139.25 26.375,141.025 R2.2
NRST: Q1.1 TB1.4 | length 25.7
  Top Layer w0.381: Q1.1 38.083,137.98 43.948,132.115 43.948,130.218 TB1.4
RST: P3.4 P6.4 R2.1 | length 41.2
  Top Layer w0.381: P6.4 7.356,105.734 7.356,114.686 14.601,121.93 15.43,121.93 v1(15.6,122.1) ; v1(18.7,124.4) 21.059,124.4 R2.1
  Bottom Layer w0.381: v1(15.6,122.1) 17.73,124.23 18.53,124.23 v1(18.7,124.4)
RX+: J5.1 J11.1 | length 26.9
  Top Layer w0.5: J11.1 18.845,201.045 15.2,197.4 15.2,181.2 17.105,179.295 J5.1
RX-: J5.2 J11.2 | length 25.9
  Top Layer w0.381: 22.76,178.025 25.5,180.765 v1(25.5,186.4)
  Top Layer w0.5: J11.2 24.425,199.775 25.5,198.7 v1(25.5,195.7)
  Bottom Layer w0.381: v1(25.5,186.4) v1(25.5,195.7)
S1: J6.2 J7.2 | length 16
  Top Layer w0.381: J7.2@55.2,50.8 55.25,50.85 J6.2@71.15,50.85
S2: J8.2 J9.2 | length 15.7
  Top Layer w0.381: J8.2@55.1,31.9 J9.2@70.8,31.9
S3: J12.2 J13.2 | length 15.5
  Top Layer w0.381: J12.2@55.2,13.08 55.28,13 J13.2@70.62,13
"SABERTOOTH RX": P1.4 TB1.33 | length 58.1
  Top Layer w0.381: P1.4 17.671,127.449 17.671,113.659 TB1.33
"SABERTOOTH TX": P1.3 TB1.34 | length 59.9
  Top Layer w0.381: P1.3 17.087,125.493 17.087,112.691 39.856,89.922 41.753,89.922 TB1.34
"SMART ELEX RX": P1.2 TB1.19 | length 40.5
  Bottom Layer w0.381: P1.2 18.07,131.04 TB1.19
"SMART ELEX TX": P1.1 TB1.20 | length 42.9
  Bottom Layer w0.381: P1.1 9.584,127.915 16.639,127.915 36.853,107.702 41.753,107.702 TB1.20
STATUS1: P2.1 TB1.95 | length 93.4
  Bottom Layer w0.381: P2.1 27.296,68.434 83.764,68.434 TB1.95
STATUS2: P2.2 TB1.93 | length 95
  Bottom Layer w0.381: P2.2 29.252,69.018 81.808,69.018 TB1.93
STATUS3: P2.3 TB1.91 | length 96.6
  Bottom Layer w0.381: P2.3 31.208,69.602 79.853,69.602 TB1.91
TT_POT: P4.2 TB1.8 | length 109.8
  Top Layer w0.381: TB1.8 47.871,129.061 47.871,159.357 63.517,175.002 91.342,175.002 P4.2
TX+: J5.3 J11.3 | length 25.9
  Top Layer w0.5: v1(15.9,178.3) 17.6,176.6 19.265,176.6 J5.3
  Bottom Layer w0.5: v1(15.9,178.3) 15.9,195.055 J11.3
TX-: J5.6 J11.6 | length 25.6
  Top Layer w0.5: J11.6 26.588,189.997 26.588,177.573 J5.6
pads on no net: J1.8 J5.4 J5.5 J5.MH1 J5.MH2 J11.MH1 J11.MH2 P2.4 TB1.1 TB1.2 TB1.6 TB1.10 TB1.12 TB1.13 TB1.16 TB1.17 TB1.18 TB1.21 TB1.22 TB1.23 TB1.24 TB1.25 TB1.26 TB1.27 TB1.28 TB1.29 TB1.30 TB1.31 TB1.32 TB1.35 TB1.36 TB1.37 TB1.38 TB1.39 TB1.40 TB1.41 TB1.42 TB1.45 TB1.47 TB1.48 TB1.53 TB1.54 TB1.55 TB1.56 TB1.57 TB1.58 TB1.59 TB1.60 TB1.61 TB1.62 TB1.63 TB1.64 TB1.65 TB1.66 TB1.67 TB1.68 TB1.69 TB1.70 TB1.71 TB1.72 TB1.73 TB1.74 TB1.76 TB1.77 TB1.79 TB1.80 TB1.82 TB1.83 TB1.87 TB1.88 TB1.89 TB1.90 TB1.96 TB1.97 TB1.98

## Polygon pours and split planes (outlines as drawn)
GND on Bottom Layer "GND_L02_P000" (solid, remove dead copper, pour order 0): 0,0 120.4,0 120.4,213.2 0,213.2
GND on Top Layer "GND_L01_P002" (solid, remove dead copper, pour order 2): 0,0 120.4,0 120.4,213.2 0,213.2

## Silkscreen, mask and mechanical layers (free items; w line width, h text height)
Top Overlay:
  text "ACT1A 5V GND" at 103.5,195.7 h2
  text "ACT2B ACT2A ACT1B" at 80.8,195.4 h2
  text "POE OUT" at 28.3,191.2 h3 r90
  text "ARM CONN" at 65.1,187.7 h3
  text "SERVO CONN" at 38.9,187.6 h3
  text "JETSON DATA" at 27.6,164.9 h3 r90
  text "24V OUT" at 21.4,150.4 h3 r90
  text "5VS S4 GND" at 102.3,143.9 h3 r90
  text "GND GND SABTX SABRX SMTX SMRX" at 12.8,141.5 h0.9 r270
  text "JTX JRX GND RST" at 12.6,123.9 h1.2 r270
  text "5VS S3 GND" at 102.4,123.6 h3 r90
  text "EMTX EXRX GND RST" at 12.7,112.7 h1 r270
  text "5VS S2 GND" at 102.4,104.4 h3 r90
  text "GND 12V          S3  S2  S1" at 12.5,101.5 h1.5 r270
  text "5VS S1 GND" at 102.7,84.2 h3 r90
  text "12V GND 24V" at 14.9,79.9 h3 r270
  text "GND 5V GND" at 15.5,60.2 h3 r270
  text "12V S1 GND" at 35.8,58.4 h3 r270
  text "12V S1 GND" at 84.5,57.6 h3 r270
  text "GND GND 5V_SERVO" at 15.4,39.7 h3 r270
  text "12V S2 GND" at 35.5,39.1 h3 r270
  text "12V S2 GND" at 84.7,39.1 h3 r270
  text "TRANSMITER" at 92.7,38.7 h3 r270
  text "CAMERA" at 30.5,25 h3 r90
  text "12V S3 GND" at 34.9,20.3 h3 r270
  text "12V S3 GND" at 85.3,18.5 h3 r270
  text "R20" at 93.7,6.9 h6
  text "MADE IN RUDRA LABS" at 108.7,3.8 h3.5 r90
  text "DESIGNED BY RAHAMATH ALI" at 114.4,3.8 h2.5 r90